# EAGLE board Milliohm_Meter (EAGLE 7.4.0)
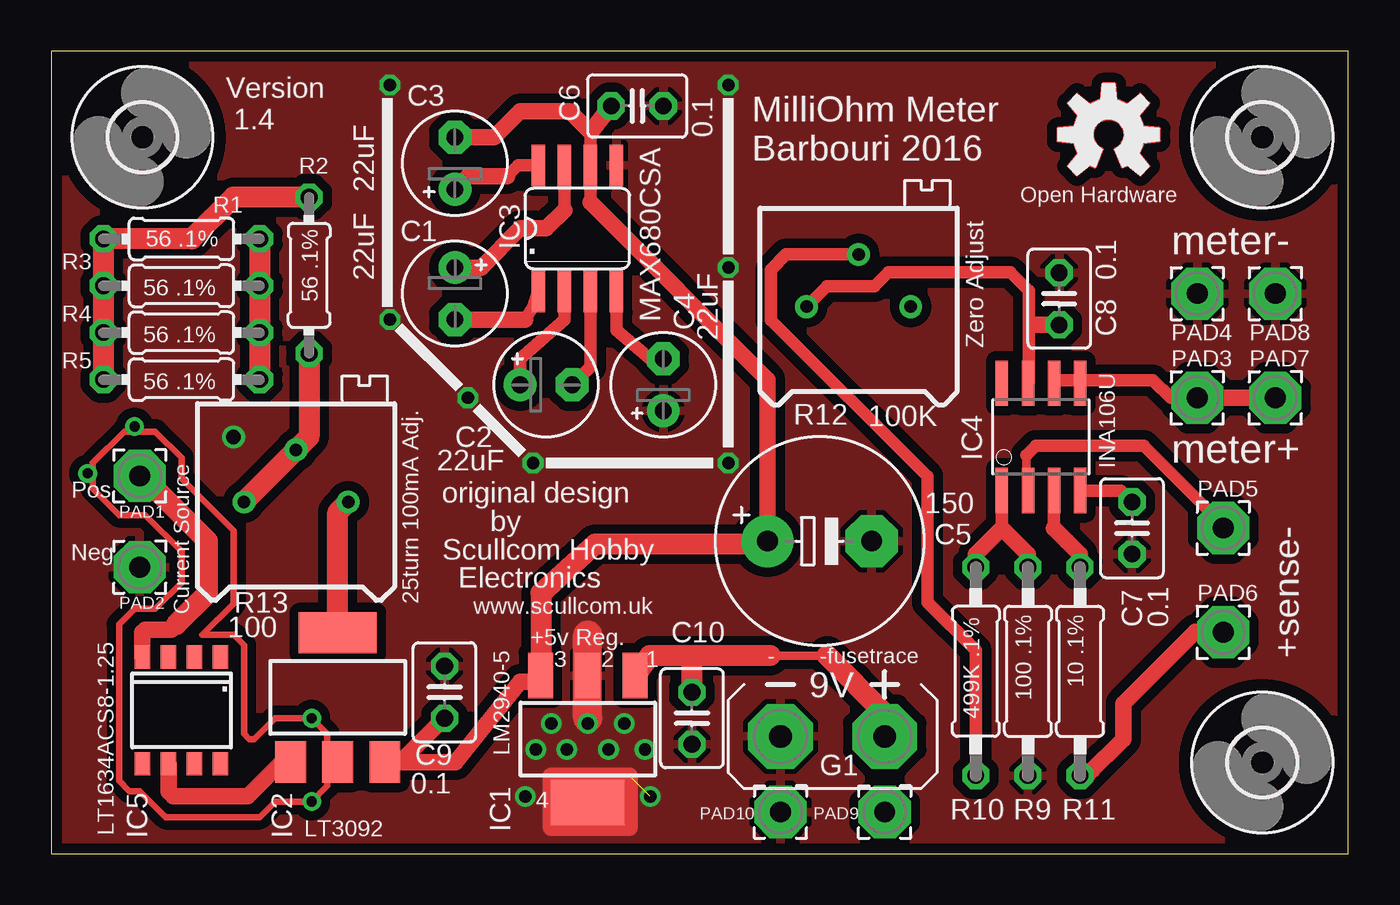
[diagram p0: board, top side]
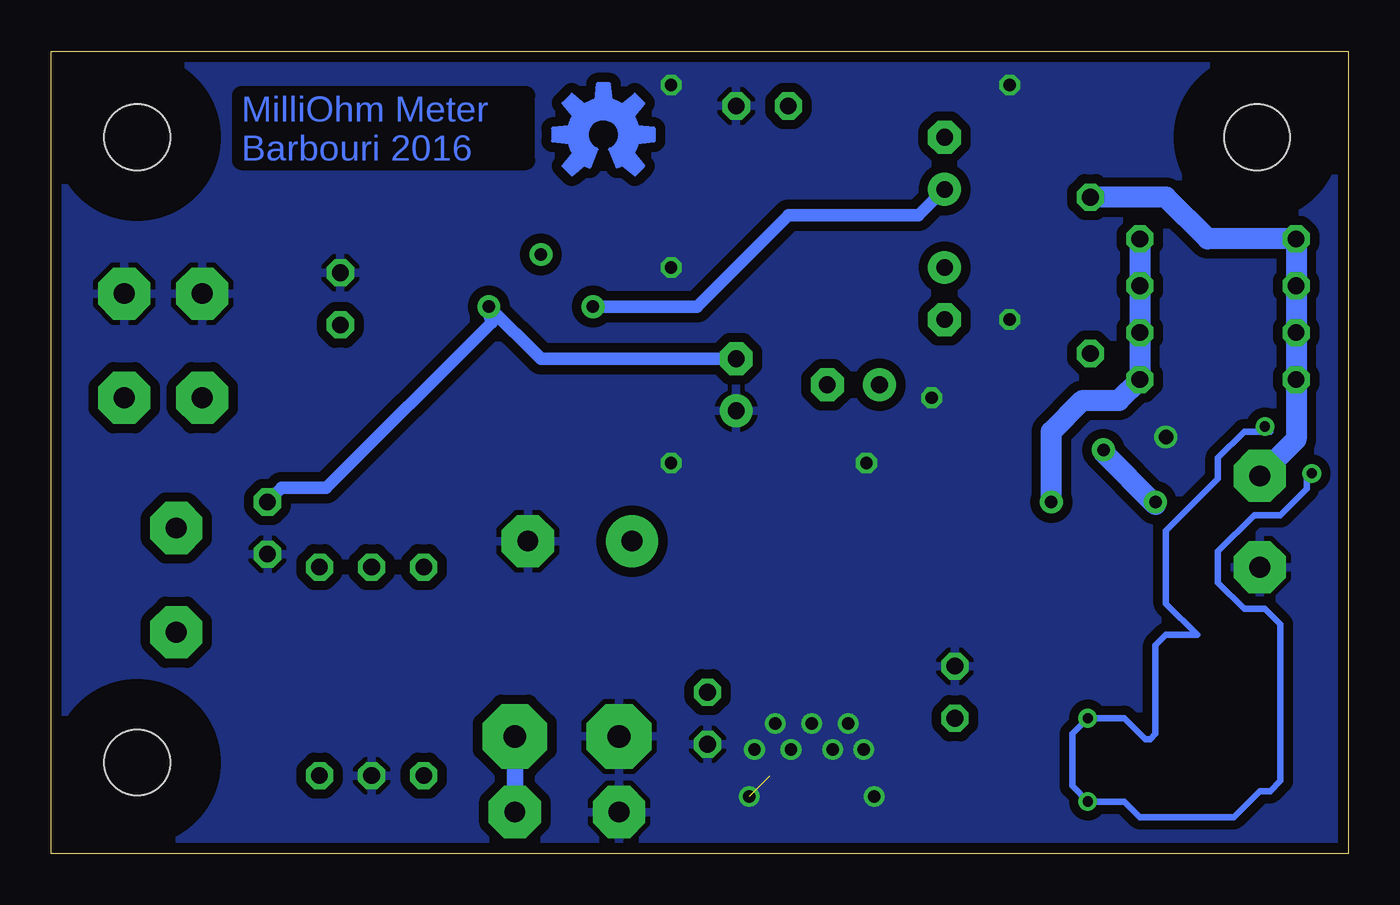
[diagram p1: board, bottom side, seen from below]

Size 63.25 x 39.12 mm. Coordinates in mm from the lower left corner, seen from the top.
Outline: 0,0 63.25,0 63.25,39.12 0,39.12 0,0
Copper layers (1*16): Top 0.035mm / dielectric 1.5mm / Bottom 0.035mm
Design rules "default *": minimum track width 10mil, minimum drill 13mil, track to track 18mil, track to pad 18mil, pad to pad 18mil, via to via 12mil, smd to smd 10mil, copper to edge 20mil, drill to drill 10mil, minimum pad ring 10mil, minimum via ring 8mil, stop-mask expansion 4mil, vias tented up to drill 0mil, thermal gap 10mil

## Footprints (pad centres in the part's own frame; a part is rotated, then mirrored left to right if it is on the bottom)
E2,5-5 = drill 0.813 pad 1.6: + -1.27,0 | drill 0.813 pad 1.6 octagon: - 1.27,0
E5-10,5 = drill 1.016 pad 2.54: + -2.54,0 | drill 1.016 pad 2.54 octagon: - 2.54,0
C025-030X050 = drill 0.813 octagon: 1 -1.27,0; 2 1.27,0
AB9V = drill 1.118 pad 3.15 octagon: + 0,2.54; - 0,-2.54
3,2 = hole 3.2: 0,0
SOT223 = smd 1.219 x 2.235: 1 -2.311,-3.099; 2 0,-3.099; 3 2.311,-3.099 | smd 3.6 x 2.2: 4 0,3.099
SOT223' = smd 1.5 x 2: 1 -2.3,-3.15; 2 0,-3.15; 3 2.3,-3.15 | smd 3.8 x 2: 4 0,3.15
SO08 = smd 0.66 x 2.032: 1 -1.905,-3.073; 2 -0.635,-3.073; 3 0.635,-3.073; 4 1.905,-3.073; 5 1.905,3.073; 6 0.635,3.073; 7 -0.635,3.073; 8 -1.905,3.073
SO08' = smd 0.61 x 2.21: 1 -1.905,-2.616; 2 -0.635,-2.616; 3 0.635,-2.616; 4 1.905,-2.616; 5 1.905,2.616; 6 0.635,2.616; 7 -0.635,2.616; 8 -1.905,2.616
S8 = smd 0.762 x 1.143: 1 -1.905,-2.6; 2 -0.635,-2.6; 3 0.635,-2.6; 4 1.905,-2.6; 5 1.905,2.6; 6 0.635,2.6; 7 -0.635,2.6; 8 -1.905,2.6
2,54/1,0 = drill 1.016 pad 2.54 octagon: 1 0,0
0204/7 = drill 0.813 octagon: 1 -3.81,0; 2 3.81,0
0207/10 = drill 0.813 octagon: 1 -5.08,0; 2 5.08,0
RTRIM64P = drill 0.61: 1 0,-2.54; 2 2.54,0; 3 0,2.54

## Placement (x,y rotation side)
C1  22uF  [E2,5-5]  19.68,27.3 270 top
C2  22uF  [E2,5-5]  24.13,22.86 0 top
C3  22uF  [E2,5-5]  19.68,33.66 90 top
C4  22uF  [E2,5-5]  29.84,22.86 90 top
C5  150  [E5-10,5]  37.47,15.24 0 top
C6  0.1  [C025-030X050]  28.57,36.45 0 top
C7  0.1  [C025-030X050]  52.7,15.88 90 top
C8  0.1  [C025-030X050]  49.15,27.05 270 top
C9  0.1  [C025-030X050]  19.18,7.87 90 top
C10  0.1  [C025-030X050]  31.24,6.6 270 top
G1  AB9V  [AB9V]  38.1,5.71 270 top
H1  MOUNT-HOLE3.2  [3,2]  59.05,34.92 0 top
H2  MOUNT-HOLE3.2  [3,2]  59.05,4.45 0 top
H3  MOUNT-HOLE3.2  [3,2]  4.45,34.92 0 top
IC1  LM2940-5  [SOT223]  26.16,5.59 180 top
IC2  LT3092  [SOT223']  13.97,7.62 0 top
IC3  MAX680CSA  [SO08]  25.65,30.48 0 top
IC4  INA106U  [SO08']  48.26,20.32 0 top
IC5  LT1634ACS8-1.25  [S8]  6.35,6.99 180 top
LOGO1  OSHW-LOGOM  [OSHW-LOGO-M]  51.56,35.05 0 top
PAD1  [2,54/1,0]  4.32,18.41 0 top
PAD2  [2,54/1,0]  4.32,13.97 0 top
PAD3  [2,54/1,0]  55.88,22.23 0 top
PAD4  [2,54/1,0]  55.88,27.3 0 top
PAD5  [2,54/1,0]  57.15,15.88 0 top
PAD6  [2,54/1,0]  57.15,10.79 0 top
PAD7  [2,54/1,0]  59.69,22.23 0 top
PAD8  [2,54/1,0]  59.69,27.3 0 top
PAD9  [2,54/1,0]  40.64,2.03 0 top
PAD10  [2,54/1,0]  35.56,2.03 0 top
R1  56 .1%  [0204/7]  6.35,29.97 0 top
R2  56 .1%  [0204/7]  12.57,28.19 270 top
R3  56 .1%  [0204/7]  6.35,27.69 0 top
R4  56 .1%  [0204/7]  6.35,25.4 0 top
R5  56 .1%  [0204/7]  6.35,23.11 0 top
R9  100 .1%  [0207/10]  47.62,8.89 270 top
R10  499K .1%  [0207/10]  45.09,8.89 90 top
R11  10 .1%  [0207/10]  50.16,8.89 270 top
R12  100K  [RTRIM64P]  39.37,26.67 90 top
R13  100  [RTRIM64P]  11.94,17.14 90 top
U$1  [OSHW-LOGO-M_COPPER]  51.56,35.05 0 top
U$2  [OSHW-LOGO-M_COPPER]  36.32,35.05 0 bottom

## Library data of the parts
C1-C10 R1-R5 R9-R13 = resistor
G1 = battery
H1-H3 = holes
IC1 = national-semiconductor; MF: NATIONAL SEMICONDUCTOR; MPN: LM2936MP-5.0/NOPB; OC_FARNELL: 1469063; OC_NEWARK: 41K4524
IC2 = v-reg
IC3 = maxim; MF: MAXIM; MPN: MAX680CSA; OC_FARNELL: 9725717; OC_NEWARK: 34C3975
IC4 = burr-brown; MF: TEXAS INSTRUMENTS; MPN: INA105KU; OC_FARNELL: 1754832; OC_NEWARK: 35C0475
IC5 = linear-technology
LOGO1 U$1 U$2 = SparkFun-Aesthetics
PAD1-PAD10 = wirepad

## Nets
CURRENT+: IC5.4 PAD1.1 R1.1 R2.1 R3.1 R4.1 R5.1
GND: C4.+ C5.- C6.2 C7.1 C8.1 C9.2 C10.2 G1.- IC1.2 IC1.4 IC3.5 PAD2.1 PAD4.1 PAD8.1 PAD10.1 R9.2
N$1: C1.- IC3.1
N$2: C2.+ IC3.2
N$3: C2.- IC3.3
N$4: C1.+ IC3.7
N$5: C3.+ C8.2 IC3.8 IC4.7 R12.3
N$6: C4.- C7.2 IC3.4 IC4.4 R12.1
N$7: IC4.3 R11.1
N$8: IC4.1 R9.1 R10.2
N$9: C10.1 G1.+ IC1.1 PAD9.1
N$10: R10.1 R12.2
N$11: R2.2 R13.2 R13.3
N$13: IC2.1 IC5.6
N$14: IC2.4 R1.2 R3.2 R4.2 R5.2 R13.1
SENSE+: PAD6.1 R11.2
SENSE-: IC4.2 PAD5.1
VCC: C3.- C5.+ C6.1 C9.1 IC1.3 IC2.3 IC3.6
VO+: IC4.5 IC4.6 PAD3.1 PAD7.1

## Tracks (layer width: path | path; a pad name or v marks a point on that pad's centre or on a via)
CURRENT+
  Top 0.61: 4.45,10.79 4.57,10.92 | 5.84,10.92 6.1,11.18
  Top 0.813: IC5.4 4.45,10.79 | 4.57,10.92 5.84,10.92 | 5.08,17.78 PAD1.1
  Top 1.016: 6.1,11.18 7.62,12.7 7.62,15.24 5.08,17.78 | R5.1 R4.1 R3.1 R1.1 6.86,29.97 8.89,32 R2.1
  Bottom 1.016: PAD1.1 2.54,20.19 R5.1 R1.1 6.86,29.97 8.89,32 12.7,32
GND  (via drill 0.6, 0.7)  (1 unrouted)
  Top 0.813: 24.38,3.81 24.38,1.27 28.19,1.27 28.19,3.81 24.38,3.81
  Top 1.422: 26.16,6.6 26.16,10.67
  other vias: 16.51,37.47 16.51,26.04 20.32,22.23 23.5,19.05 33.02,19.05 33.02,28.57 33.02,37.47 23.11,2.79 29.21,2.79 23.62,5.08 25.15,5.08 27.18,5.08 28.96,5.08 27.94,6.35 26.16,6.35 24.38,6.35 8.89,20.32
  pour Top: -0.25,-0.51 -0.25,39.37 63.25,39.37 63.25,-0.51
  pour Bottom: -0.25,-0.51 -0.25,39.37 63.25,39.37 63.25,-0.51
N$1
  Top 0.61: IC3.1 23.5,26.67 23.11,26.04
  Top 0.813: 23.11,26.04 C1.-
N$2
  Top 0.61: IC3.2 25.02,26.04 22.86,24.13 C2.+
N$3
  Top 0.61: IC3.3 26.29,23.75 C2.-
N$4
  Top 0.61: 25.02,31.37 IC3.7
  Top 0.813: C1.+ 20.95,28.57 22.86,30.48 24.13,30.48 25.02,31.37
N$5
  Top 0.254: 37.16,26.98 36.93,26.98 36.7,26.75 | 47.55,23.09 IC4.7
  Top 0.61: 36.7,26.75 36.75,26.75 R12.3 37.82,27.66 40.13,27.66 40.82,28.35 46.76,28.35 47.68,27.43 47.68,25.65 | IC3.8 22.76,33.55 22.23,33.02 | 47.68,25.65 47.68,22.99 IC4.7 | 47.8,25.78 47.68,25.65
  Top 0.813: 22.23,33.02 20.32,33.02 C3.+ | C8.2 47.8,25.78
  Bottom 0.61: C3.+ 20.95,31.11 27.3,31.11 31.75,26.67 R12.3
N$6
  Top 0.254: 50.29,17.83 IC4.4
  Top 0.61: IC3.4 27.56,25.53 29.21,24.13 C4.- | IC4.4 52.15,17.7 C7.2
  Bottom 0.254: 41.96,26.52 R12.1
  Bottom 0.61: 41.96,26.52 41.78,25.88 49.84,17.83 52.02,17.83 C7.2 | R12.1 39.37,24.13 C4.-
N$7
  Top 0.61: IC4.3 48.9,15.88
  Top 0.813: 48.9,15.88 49.53,15.24 50.16,14.61 R11.1
N$8
  Top 0.61: IC4.1 46.35,15.88
  Top 0.813: R10.2 45.09,14.61 46.35,15.88 47.62,14.61 R9.1
N$9
  Top 0.406: 37.85,9.65 35.05,9.65
  Top 1.016: G1.+ 40.64,6.86 37.85,9.65 | 35.05,9.65 31.24,9.65 | 31.24,9.65 29.18,9.65 IC1.1 | C10.1 31.24,9.65
  Bottom 0.813: PAD9.1 G1.+
N$10
  Top 0.61: R12.2 35.84,29.21 35.1,28.47 35.1,26.01 42.72,18.39 42.72,12.27 45.09,9.91 R10.1
N$11
  Top 1.016: R13.3 R13.2 12.57,20.32 R2.2
N$12  (via drill 0.5)
  Top 0.305: 13.46,5.33 13.46,5.84 v12.7,6.6 10.92,6.6 9.91,5.59 9.65,5.59 9.4,5.84 9.4,10.16 8.89,10.67 7.37,10.67 8.89,12.19 8.89,15.75 6.35,18.29 6.35,19.3 5.08,20.57 3.56,20.57 2.03,19.05 2.03,17.78 3.3,16.51 4.57,16.51 6.35,14.73 6.35,13.21 5.08,11.94 4.06,11.94 3.3,11.18 3.3,3.56 3.81,3.05 4.32,3.05 5.59,1.78 10.16,1.78 10.92,2.54 v12.7,2.54 13.46,3.3 13.46,3.81
  Bottom 0.305: v1.78,18.54 2.03,18.54 2.03,17.78 3.3,16.51 4.57,16.51 6.35,14.73 6.35,13.21 5.08,11.94 4.06,11.94 3.3,11.18 3.3,3.56 3.81,3.05 4.32,3.05 5.59,1.78 10.16,1.78 10.92,2.54 v12.7,2.54 13.46,3.3 13.46,5.84 v12.7,6.6 10.92,6.6 9.91,5.59 9.65,5.59 9.4,5.84 9.4,10.16 8.89,10.67 7.37,10.67 8.89,12.19 8.89,15.75 6.35,18.29 6.35,19.3 5.08,20.57 4.06,20.57 v4.06,20.83 3.81,20.57
N$13
  Top 0.254: 12.04,4.57 IC2.1
  Top 0.61: 12.04,4.57 11.35,4.57
  Top 0.813: IC5.6 5.71,3.02 5.94,2.79 9.58,2.79 11.35,4.57
N$14
  Top 1.016: IC2.4 13.97,16.64 R13.1 | R1.2 R5.2
  Bottom 1.016: R13.1 14.48,20.57 12.95,22.1 11.18,22.1 R5.2 R4.2 R3.2 R1.2
N$15
  Bottom 1.016: 9.4,17.02 11.94,19.56
SENSE+
  Top 0.254: 50.57,3.89 50.98,3.89 R11.2
  Top 0.813: 50.57,3.89 52.27,5.59 52.27,7.32 55.78,10.82 PAD6.1
SENSE-
  Top 0.254: 47.55,17.83 IC4.2 | 57.05,15.85 PAD5.1
  Top 0.406: 47.55,19.43 47.55,17.83
  Top 0.61: 47.55,19.43 48.01,19.89 53.29,19.89 56.72,16.46 56.72,16.18 57.05,15.85
VCC
  Top 0.254: 35.43,15.09 C5.+
  Top 0.61: 26.29,35.18 IC3.6 26.29,31.75
  Top 0.813: C3.- 21.59,34.92 22.86,36.2 25.27,36.2 26.29,35.18 C6.1 | 26.29,31.75 34.92,23.11 C5.+ | IC2.3 17.02,4.47 | 17.02,4.47 19.71,4.47 22.86,8.38 23.55,8.38 IC1.3 | C9.1 19.15,6.6 17.02,4.47
  Top 1.016: 35.43,15.09 26.52,15.09 23.88,12.7 23.88,8.71 IC1.3
VO+
  Top 0.254: 48.92,23.09 IC4.6 | 50.06,23.09 IC4.5 50.29,23.09
  Top 0.61: 50.06,23.09 48.92,23.09 | 50.29,23.09 53.72,23.09 54.59,22.23 PAD3.1
  Top 0.813: PAD7.1 PAD3.1

## Text on the board
Bottom: MilliOhm Meter / Barbouri 2016
tNames: Version / 1.4 | MilliOhm Meter / Barbouri 2016 | Open Hardware | . | meter- | Zero Adjust | meter+ | Pos | Neg | original design / by / Scullcom Hobby / Electronics | Current Source | 25turn 100mA Adj. | www.scullcom.uk | +5v Reg. | +sense- | - | -fusetrace | .